# Altium PCB Rene_panel_pcb.PcbDoc
Units mm, origin at the board's own origin, x right, y up, seen from the top; angles counter-clockwise.
Board outline 172.2 x 128.5 mm, 2 copper layers (Top Layer, Bottom Layer); 74 components, 37 nets, 271 pads, 8 vias.
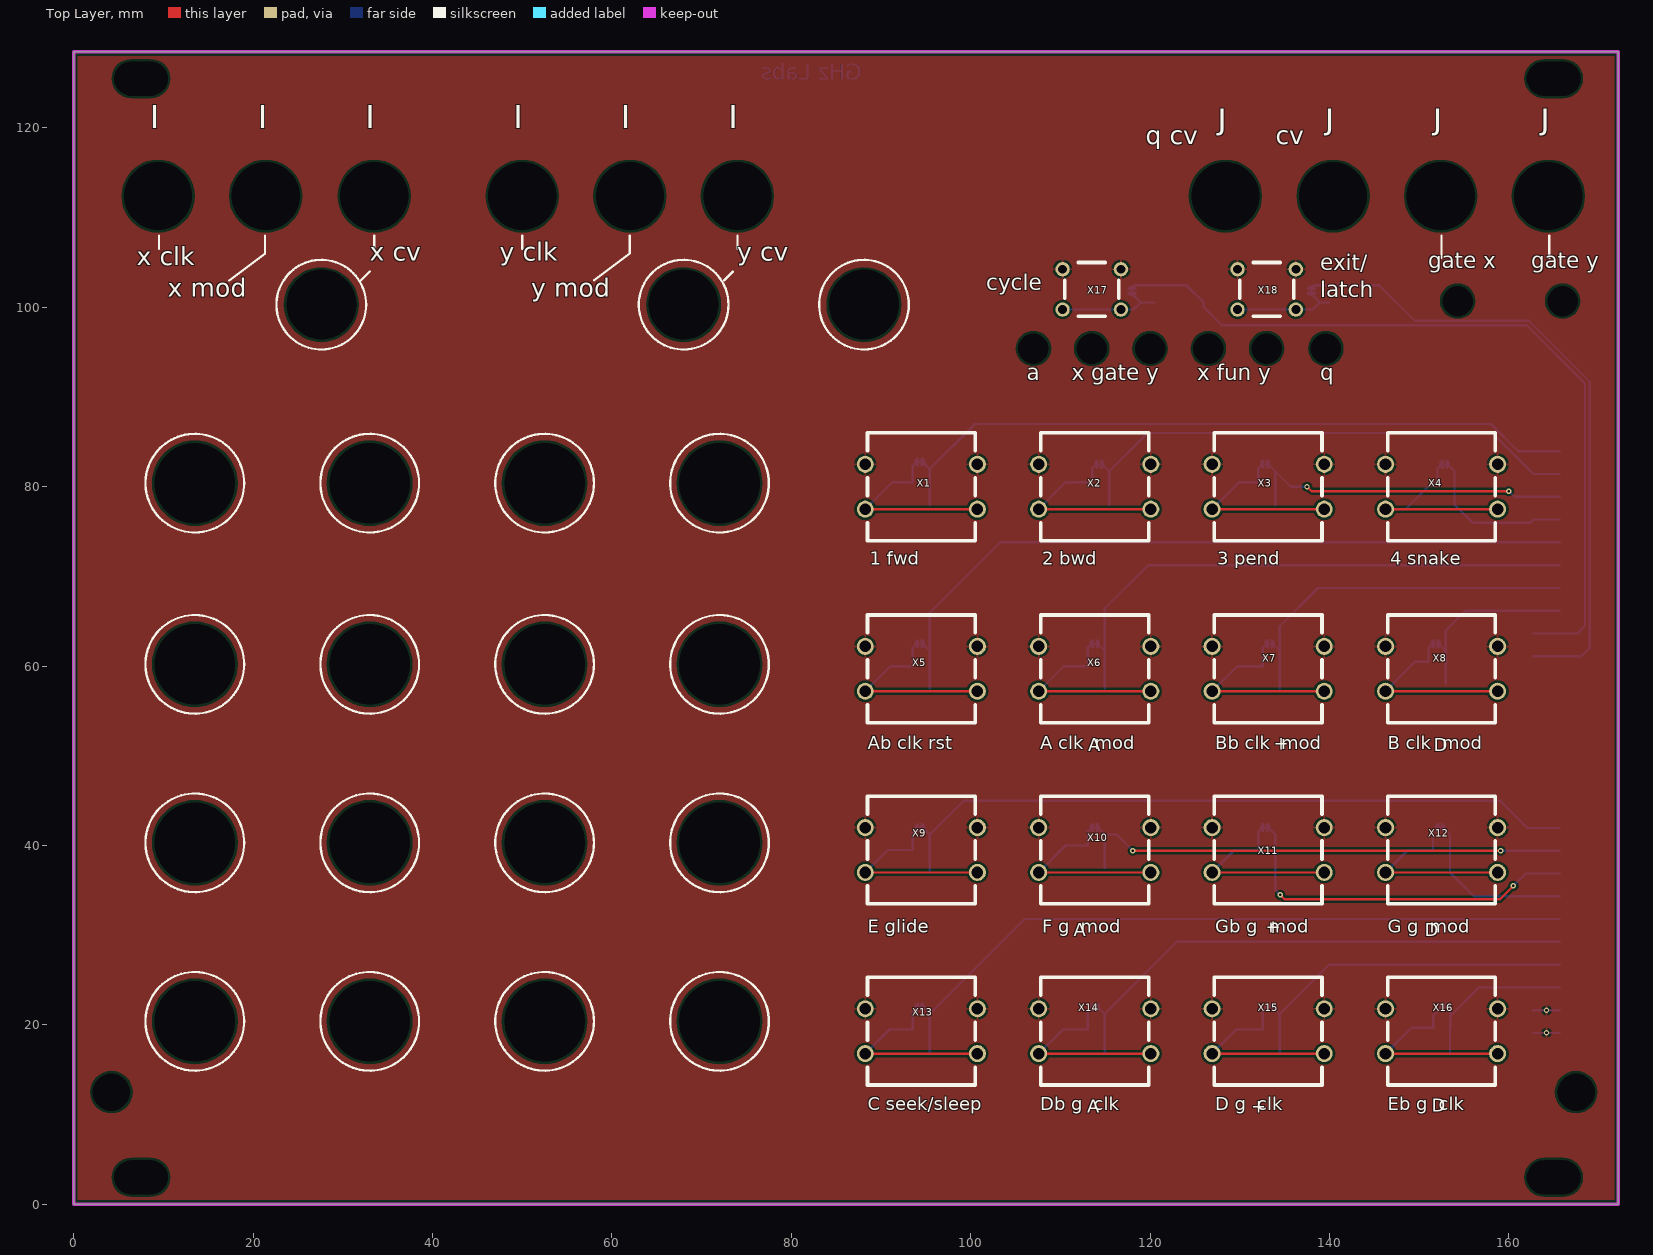
[diagram p0: Top Layer view]
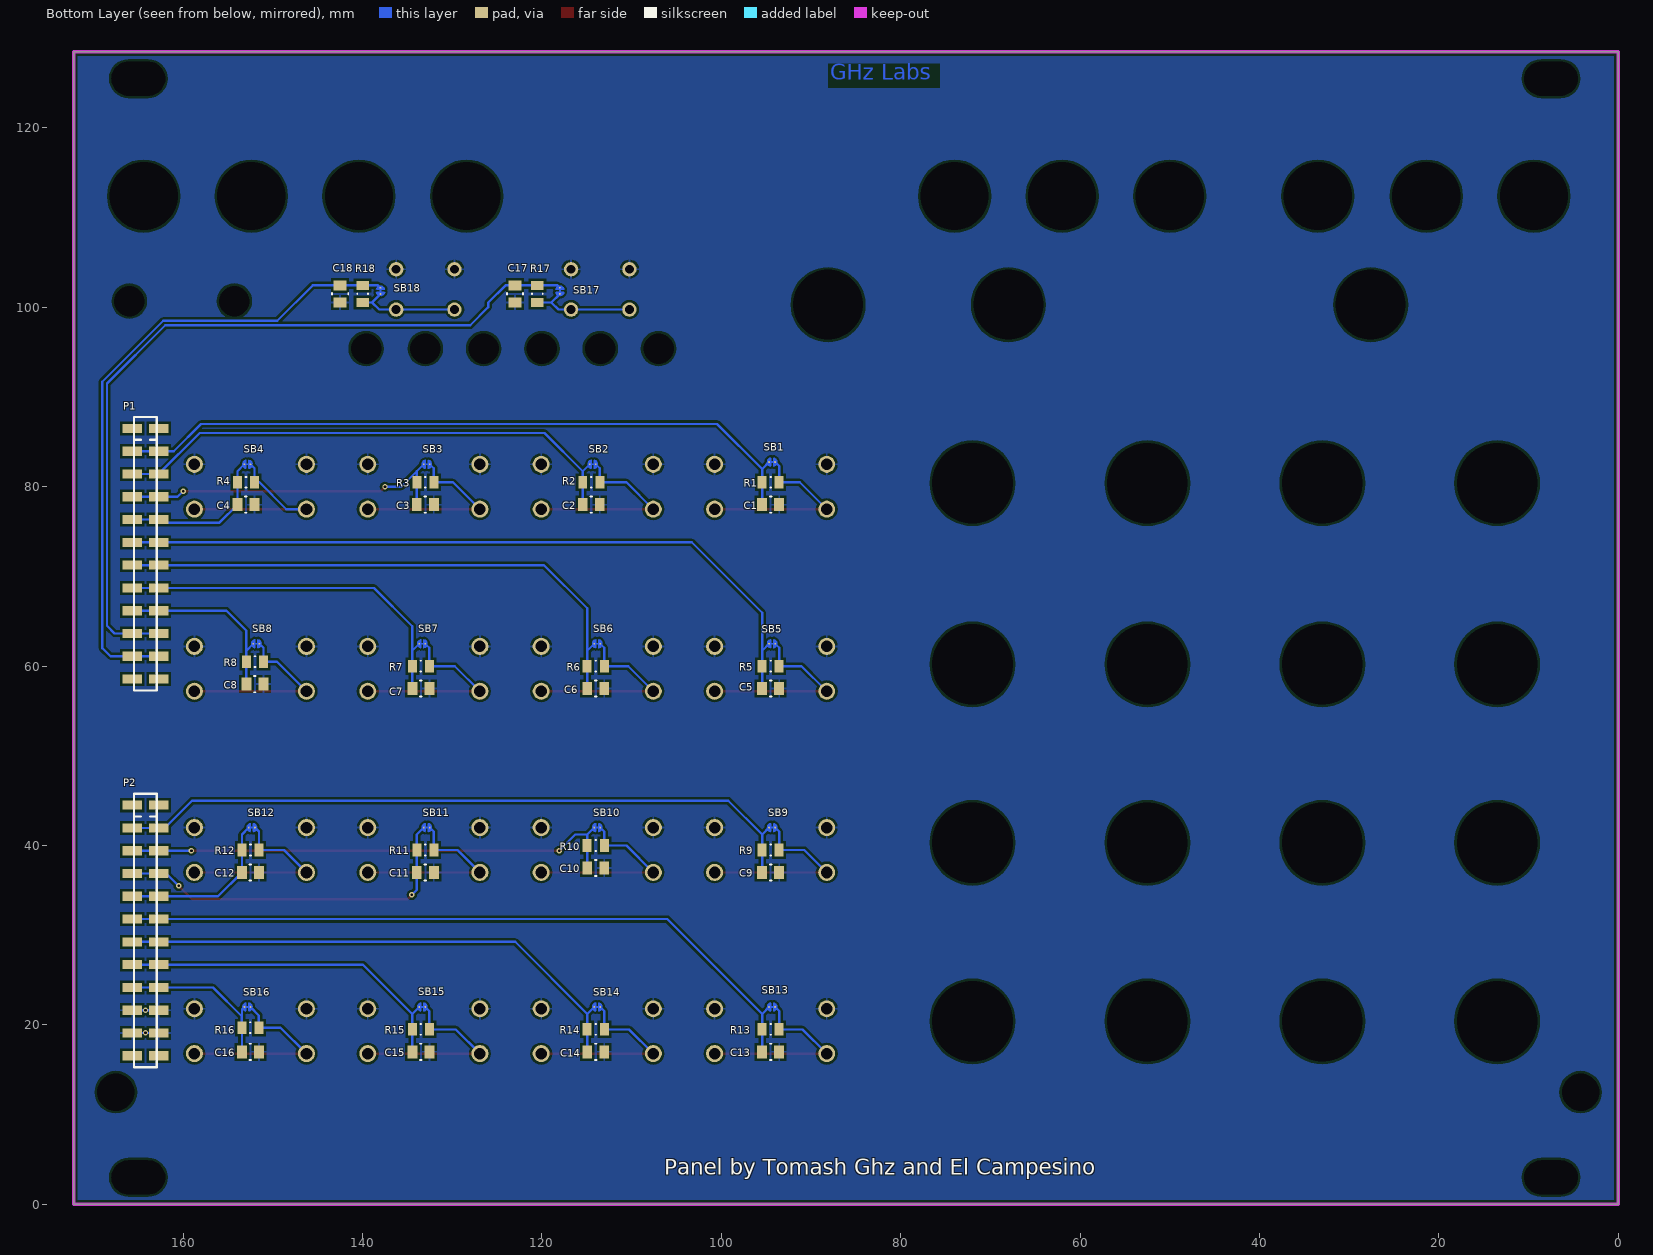
[diagram p1: Bottom Layer view, seen from below]
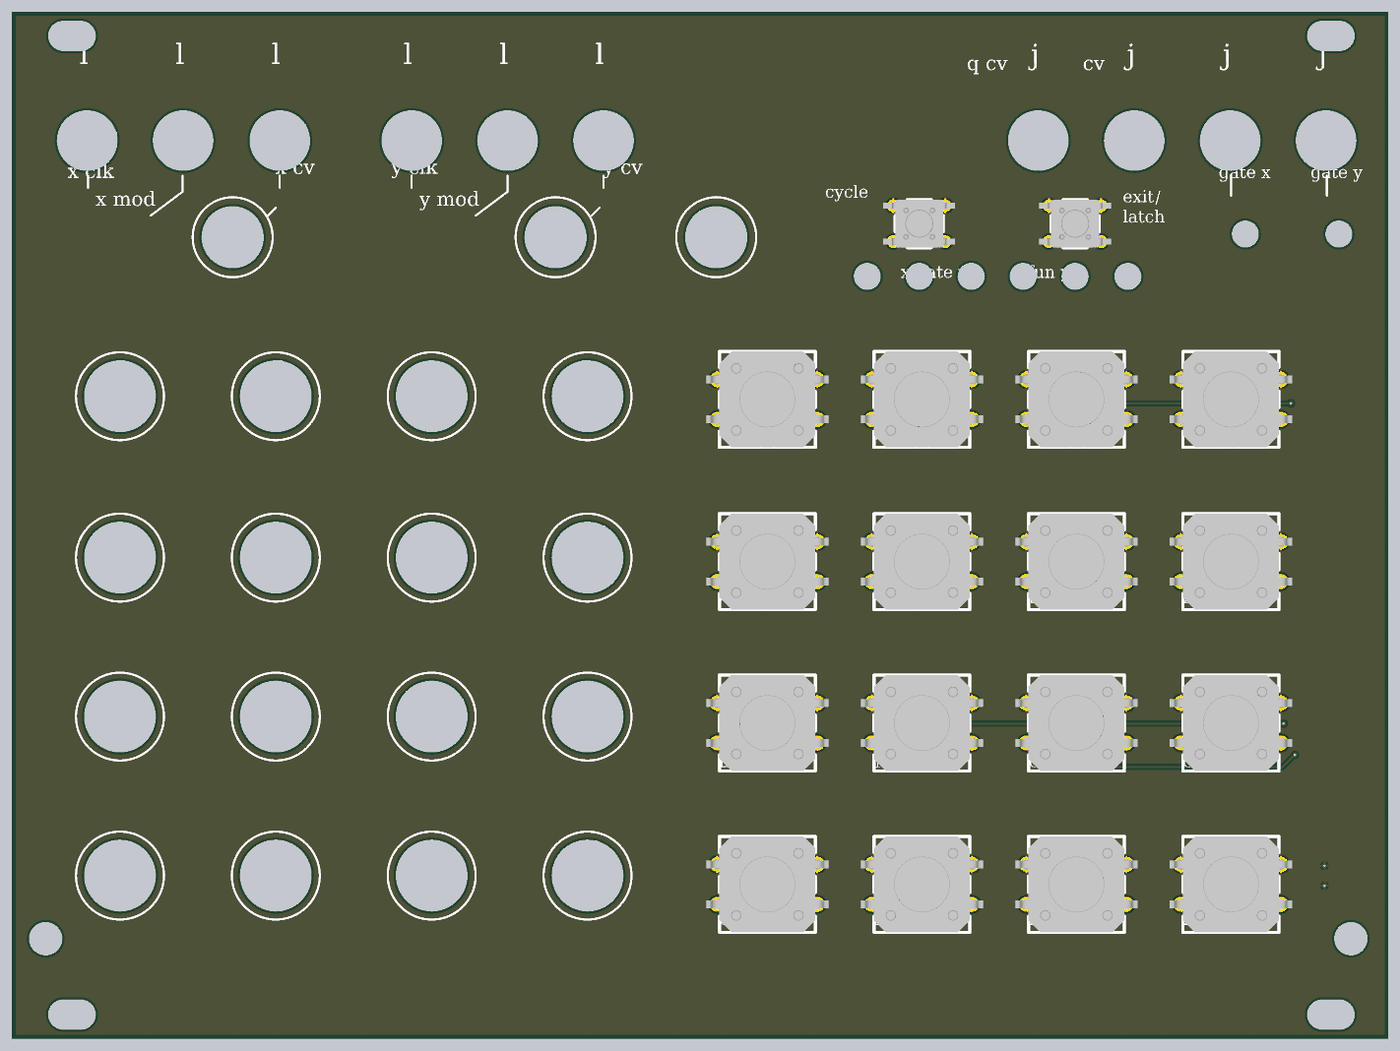
[diagram p2: 3D render of the assembled board from above, using the file's embedded part models]
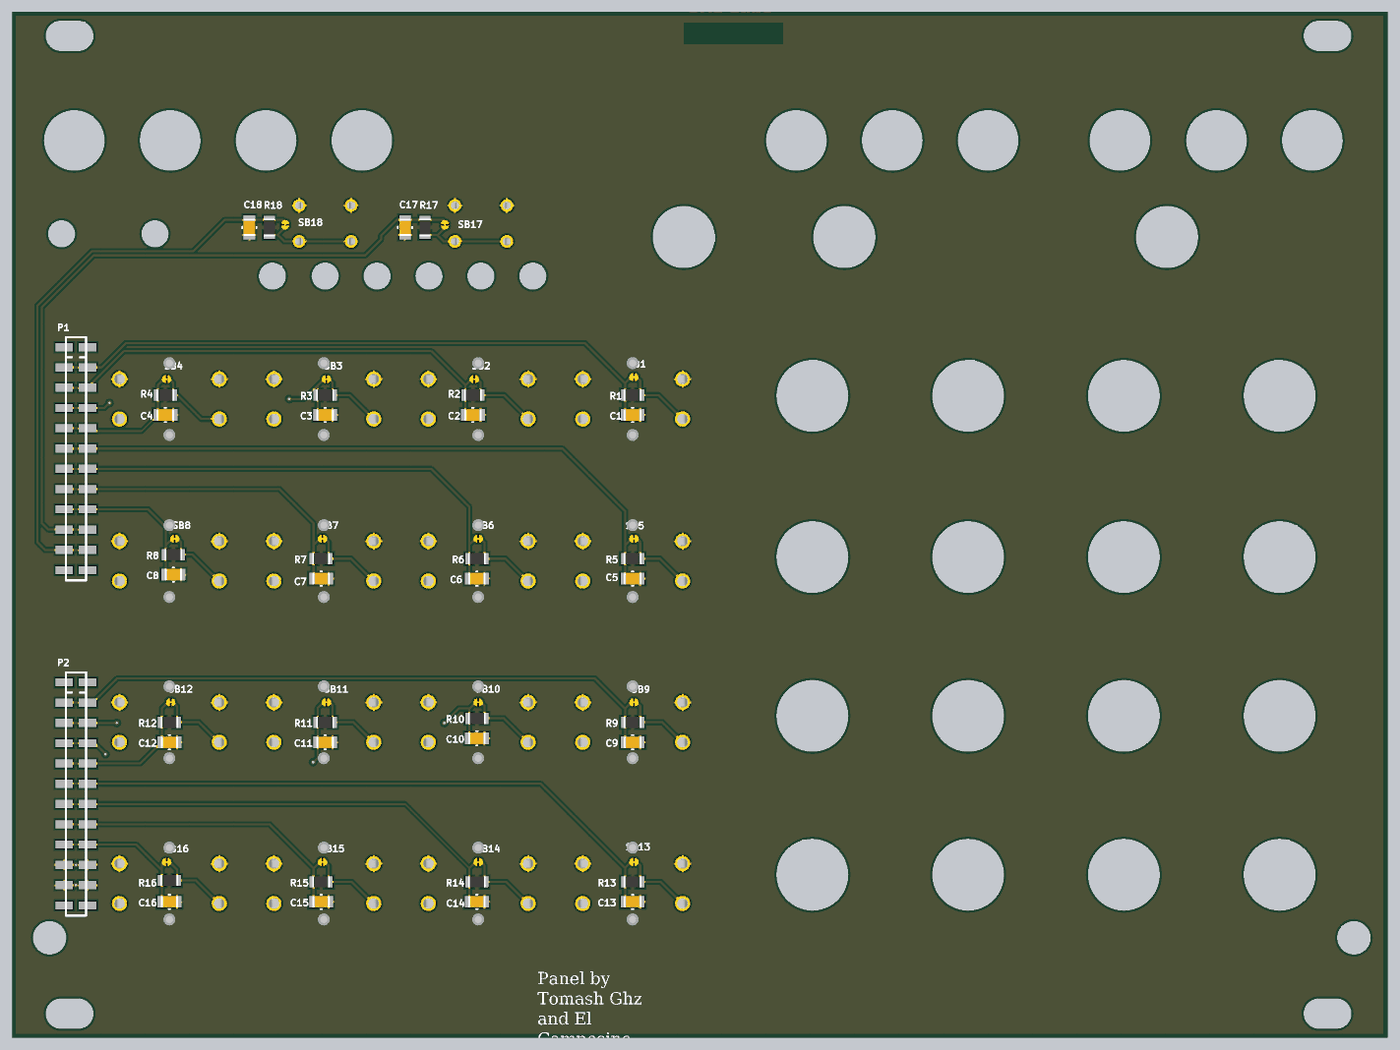
[diagram p3: 3D render of the assembled board from below, using the file's embedded part models]

## Layer stack, top to bottom
Top Solder: solder mask 0.0102, Solder Resist, Dk 3.5
Top Layer: signal copper 0.0356
Dielectric 1: dielectric 0.32, FR-4, Dk 4.8
Bottom Layer: signal copper 0.0356
Bottom Solder: solder mask 0.0102, Solder Resist, Dk 3.5

## Board outline
0,0 0,128.5 172.2,128.5 172.2,0

## Design rules (kind name [scope] priority, off if disabled: settings)
Clearance [All] p1: gap=0.254
PolygonConnect [All] p1: connectstyle=Relief reliefconductorwidth=0.254 reliefentries=4 polygonreliefangle="90 Angle" airgapwidth=0.254
RoutingVias [All] p1: holewidth=0.711 width=1.27 viastyle="Through Hole" minholewidth=0.711 minwidth=1.27 maxholewidth=0.711 maxwidth=1.27
SolderMaskExpansion [All] p1: expansion=0.102
Width [All] p1: maxlimit=0.254 minlimit=0.254 preferedwidth=0.254
30 further rules are at their usual default settings.

## Components (designator, comment, footprint, x,y, rotation, side; value= is the part's Value field where it differs from the comment)
C1 "100nF" CAPA_0805 94.5,78 r0 bottom
C2 "100nF" CAPA_0805 114.5,78 r0 bottom
C3 "100nF" CAPA_0805 133,78 r0 bottom
C4 "100nF" CAPA_0805 153,78 r0 bottom
C5 "100nF" CAPA_0805 94.5,57.5 r0 bottom
C6 "100nF" CAPA_0805 114,57.5 r0 bottom
C7 "100nF" CAPA_0805 133.5,57.5 r0 bottom
C8 "100nF" CAPA_0805 152,58 r0 bottom
C9 "100nF" CAPA_0805 94.5,37 r0 bottom
C10 "100nF" CAPA_0805 114,37.5 r0 bottom
C11 "100nF" CAPA_0805 133,37 r0 bottom
C12 "100nF" CAPA_0805 152.5,37 r0 bottom
C13 "100nF" CAPA_0805 94.5,17 r0 bottom
C14 "100nF" CAPA_0805 114,17 r0 bottom
C15 "100nF" CAPA_0805 133.5,17 r0 bottom
C16 "100nF" CAPA_0805 152.5,17 r0 bottom
C17 "100nF" CAPA_0805 123,101.5 r90 bottom
C18 "100nF" CAPA_0805 142.5,101.5 r90 bottom
P1 "Header 12" LIST_1x12_SMD 164.2,86.5 r270 bottom locked
P2 "Header 12" LIST_1x12_SMD 164.2,44.5 r270 bottom locked
R1 "1k" RES_0805 94.5,80.5 r180 bottom
R2 "1k" RES_0805 114.5,80.5 r180 bottom
R3 "1k" RES_0805 133,80.5 r180 bottom
R4 "1k" RES_0805 153,80.5 r180 bottom
R5 "1k" RES_0805 94.5,60 r180 bottom
R6 "1k" RES_0805 114,60 r180 bottom
R7 "1k" RES_0805 133.5,60 r180 bottom
R8 "1k" RES_0805 152,60.5 r180 bottom
R9 "1k" RES_0805 94.5,39.5 r180 bottom
R10 "1k" RES_0805 114,40 r180 bottom
R11 "1k" RES_0805 133,39.5 r180 bottom
R12 "1k" RES_0805 152.5,39.5 r180 bottom
R13 "1k" RES_0805 94.5,19.5 r180 bottom
R14 "1k" RES_0805 114,19.5 r180 bottom
R15 "1k" RES_0805 133.5,19.5 r180 bottom
R16 "1k" RES_0805 152.508,19.689 r180 bottom
R17 "1k" RES_0805 120.5,101.5 r270 bottom
R18 "1k" RES_0805 140,101.5 r270 bottom
SB1 "Solderbridge" Solderbridge_Shorted 94,82.75 r0 bottom net-tie
SB2 "Solderbridge" Solderbridge_Shorted 114,82.5 r0 bottom net-tie
SB3 "Solderbridge" Solderbridge_Shorted 132.5,82.5 r0 bottom net-tie
SB4 "Solderbridge" Solderbridge_Shorted 152.5,82.5 r0 bottom net-tie
SB5 "Solderbridge" Solderbridge_Shorted 94,62.5 r0 bottom net-tie
SB6 "Solderbridge" Solderbridge_Shorted 113.5,62.5 r0 bottom net-tie
SB7 "Solderbridge" Solderbridge_Shorted 133,62.5 r0 bottom net-tie
SB8 "Solderbridge" Solderbridge_Shorted 151.5,62.5 r0 bottom net-tie
SB9 "Solderbridge" Solderbridge_Shorted 94,42 r0 bottom net-tie
SB10 "Solderbridge" Solderbridge_Shorted 113.5,42 r0 bottom net-tie
SB11 "Solderbridge" Solderbridge_Shorted 132.5,42 r0 bottom net-tie
SB12 "Solderbridge" Solderbridge_Shorted 152,42 r0 bottom net-tie
SB13 "Solderbridge" Solderbridge_Shorted 94,22 r0 bottom net-tie
SB14 "Solderbridge" Solderbridge_Shorted 113.5,22 r0 bottom net-tie
SB15 "Solderbridge" Solderbridge_Shorted 133,22 r0 bottom net-tie
SB16 "Solderbridge" Solderbridge_Shorted 152.5,22 r0 bottom net-tie
SB17 "Solderbridge" Solderbridge_Shorted 118,101.5 r90 bottom net-tie
SB18 "Solderbridge" Solderbridge_Shorted 138,101.5 r90 bottom net-tie
X1 "101-0124-EV" Tactile_switch_12mm_TH 94.5,80 r180 top locked
X2 "101-0124-EV" Tactile_switch_12mm_TH 113.833,80 r180 top locked
X3 "101-0124-EV" Tactile_switch_12mm_TH 133.167,80 r180 top locked
X4 "101-0124-EV" Tactile_switch_12mm_TH 152.5,80 r180 top locked
X5 "101-0124-EV" Tactile_switch_12mm_TH 94.5,59.7 r180 top locked
X6 "101-0124-EV" Tactile_switch_12mm_TH 113.833,59.7 r180 top locked
X7 "101-0124-EV" Tactile_switch_12mm_TH 133.167,59.7 r180 top locked
X8 "101-0124-EV" Tactile_switch_12mm_TH 152.5,59.7 r180 top locked
X9 "101-0124-EV" Tactile_switch_12mm_TH 94.5,39.5 r180 top locked
X10 "101-0124-EV" Tactile_switch_12mm_TH 113.833,39.5 r180 top locked
X11 "101-0124-EV" Tactile_switch_12mm_TH 133.167,39.5 r180 top locked
X12 "101-0124-EV" Tactile_switch_12mm_TH 152.5,39.5 r180 top locked
X13 "101-0124-EV" Tactile_switch_12mm_TH 94.5,19.3 r180 top locked
X14 "101-0124-EV" Tactile_switch_12mm_TH 113.833,19.3 r180 top locked
X15 "101-0124-EV" Tactile_switch_12mm_TH 133.167,19.3 r180 top locked
X16 "101-0124-EV" Tactile_switch_12mm_TH 152.5,19.3 r180 top locked
X17 "PTS645SM43SMTR 92 LFS" Tactile_switch_6mm_TH 113.5,102 r180 top
X18 "PTS645SM43SMTR 92 LFS" Tactile_switch_6mm_TH 133,102 r180 top

## Footprints (in the part's own frame and the unit in brackets; to place one, negate y for a bottom-side part, rotate by r counter-clockwise, add the part's x,y. Pads: shape width x height; smd on the part's side, far side on the other; paste and mask are expansions set on the pad)
CAPA_0805 [mm]
  rect 1.1x1.45 smd: 1(-0.95,0) 2(0.95,0)
  silkscreen extent -0.1,-0.9 0.1,0.9, body extent -1.1,-0.72 1.1,0.72, height 0.5
LIST_1x12_SMD [mm] "Pin List, 2.54mm, SMD"
  rect 1.02x2.19 smd: 1(0,-1.465) 1(0,1.465) 2(2.54,-1.465) 2(2.54,1.465) 3(5.08,-1.465) 3(5.08,1.465) 4(7.62,-1.465) 4(7.62,1.465) 5(10.16,-1.465) 5(10.16,1.465) 6(12.7,-1.465) 6(12.7,1.465) 7(15.24,-1.465) 7(15.24,1.465) 8(17.78,-1.465) 8(17.78,1.465) 9(20.32,-1.465) 9(20.32,1.465) 10(22.86,-1.465) 10(22.86,1.465) 11(25.4,-1.465) 11(25.4,1.465) 12(27.94,-1.465) 12(27.94,1.465)
  silkscreen extent -1.27,-1.27 29.21,1.27
RES_0805 [mm] "0805 Chip Resistor, 2-Leads, Body 2.05x1.25mm, IPC Medium Density"
  rect 1x1.4 smd: 1(-0.95,0) 2(0.95,0)
  silkscreen extent -0.05,-0.6 0.05,0.6, body extent -1.1,-0.7 1.1,0.7, height 0.5
Solderbridge_Shorted [mm]
  round 0.2 smd paste-10: 1(0,0) 2(0.676,0)
  Top Layer region: 0.236,-0.432 0.16,-0.505 0.042,-0.467 -0.023,-0.424 -0.097,-0.351 -0.15,-0.292 -0.208,-0.193 -0.236,-0.099 -0.231,0.122 -0.206,0.193 -0.122,0.33 -0.038,0.411 0.054,0.469 0.155,0.5 0.206,0.483 0.236,0.43
  Top Layer region: 0.44,0.432 0.516,0.505 0.634,0.467 0.699,0.424 0.772,0.351 0.826,0.292 0.884,0.193 0.912,0.099 0.907,-0.122 0.881,-0.193 0.798,-0.33 0.714,-0.411 0.622,-0.469 0.521,-0.5 0.47,-0.483 0.44,-0.43
  Top Layer lines w0.152: 0.159,0.431 ccw(c0.27,0) 0.159,-0.431 ; 0.516,0.431 cw(c0.406,0) 0.516,-0.431
  Top Layer lines w0.203: 0,0 0.676,0
Tactile_switch_6mm_TH [mm] "TH 6mmx6mm Tactile Switch"
  round 1.6 hole 1: 1(-3.25,2.25) 1(3.25,2.25) 2(-3.25,-2.25) 2(3.25,-2.25)
  silkscreen extent -3,-3 3,3, body extent -4.5,-3 4.5,3, height 4.3
Tactile_switch_12mm_TH [mm] "TH 12mmx12mm Tactile Switch"
  round 1.9 hole 1.3: 1(-6.25,2.5) 1(6.25,2.5) 2(-6.25,-2.5) 2(6.25,-2.5)
  silkscreen extent -6,-6 6,6, body extent -7.65,-6 7.65,6, height 4.3

## Part data
C1 C2 C3 C4 C5 C6 C7 C8 C9 C10 C11 C12 C13 C14 C15 C16 C17 C18: library part Capacitor, "100nF 0805"
P1 P2: "Header, 12-Pin"
R1 R2 R3 R4 R5 R6 R7 R8 R9 R10 R11 R12 R13 R14 R15 R16 R17 R18: library part Resistor, "10k 0805"
SB1 SB2 SB3 SB4 SB5 SB6 SB7 SB8 SB9 SB10 SB11 SB12 SB13 SB14 SB15 SB16 SB17 SB18: library part SOLDERBRIDGE_SHORTED, "Shorted Solderbridge"
X1 X2 X3 X4 X5 X6 X7 X8 X9 X10 X11 X12 X13 X14 X15 X16 X17 X18: library part "SWITCH/Push Button-EVPAWBA2A", "Push Button SMD EVPAWBA2A"

## Free pads (board coordinates)
  round 0 hole 3.8 slot 6 at 0 deg unplated: 1(7.5,3) 1(7.5,125.5) 1(165,3) 1(165,125.5)
  round 0 hole 9 unplated: 2(13.5,20.4) 2(13.5,40.3) 2(13.5,60.2) 2(13.5,80.4) 2(33,80.4) 2(33,20.4) 2(33,40.3) 2(33,60.2) 2(52.5,80.4) 2(52.5,20.4) 2(52.5,40.3) 2(52.5,60.2) 2(72,80.4) 2(72,20.4) 2(72,40.3) 2(72,60.2)
  round 0 hole 7.6 unplated: 3(9.4,112.4) 3(21.4,112.4) 3(33.5,112.4) 3(50,112.4) 3(62,112.4) 3(74,112.4) 3(128.4,112.4) 3(140.4,112.4) 3(152.4,112.4) 3(164.4,112.4)
  round 0 hole 7.8 unplated: 4(27.6,100.3) 4(68,100.3) 4(88.1,100.3)
  round 0 hole 3.4 unplated: 5(154.3,100.7) 5(166,100.7) 6(107,95.4) 6(113.5,95.4) 6(120,95.4) 6(126.5,95.4) 6(133,95.4) 6(139.6,95.4)
  round 0 hole 4.2 unplated: 7(4.2,12.5)
  round 0 hole 4.2 unplated paste+0: 7(167.5,12.5)

## Via types
v1: diameter 0.6, hole 0.3, Top Layer to Bottom Layer, tented both sides, 8 vias

## Nets (pads, with @x,y where several pads share a name; then routed paths per layer and width w, separated by ;. In a path a pad name is that pad's centre, name@x,y a point inside that pad or via, vN(x,y) a via of type N, cw(c..) or ccw(c..) an arc to the next point about the centre after c; other vN are vias at no path point)
GND: C1.1 C2.1 C3.1 C4.1 C5.1 C6.1 C7.1 C8.1 C9.1 C10.1 C11.1 C12.1 C13.1 C14.1 C15.1 C16.1 C17.1 C18.1 P2.10 P2.11 X1.2 X2.2 X3.2 X4.2 X5.2 X6.2 X7.2 X8.2 X9.2 X10.2 X11.2 X12.2 X13.2 X14.2 X15.2 X16.2 X17.2 X18.2 | length 5.9
  Bottom Layer w0.254: P2.11@162.735,19.1 P2.11@165.665,19.1 ; P2.10@162.735,21.64 P2.10@165.665,21.64
  other v1: 164.2,19.125 164.2,21.625
NetR1_2: R1.2 SB1.1 X1.1 | length 21.5
  Top Layer w0.254: X1.1@88.25,77.5 X1.1@100.75,77.5
  Bottom Layer w0.254: X1.1@88.25,77.5 91.25,80.5 R1.2 93.55,82.3 SB1.1
NetR2_2: R2.2 SB2.1 X2.1 | length 21.9
  Top Layer w0.254: X2.1@107.583,77.5 X2.1@120.083,77.5
  Bottom Layer w0.254: X2.1@107.583,77.5 110.583,80.5 R2.2 113.55,82.05 SB2.1
NetR3_2: R3.2 SB3.1 X3.1 | length 21.1
  Top Layer w0.254: X3.1@126.917,77.5 X3.1@139.417,77.5
  Bottom Layer w0.254: X3.1@126.917,77.5 129.917,80.5 R3.2 132.05,82.05 SB3.1
NetR4_2: R4.2 SB4.1 X4.1 | length 21.7
  Top Layer w0.254: X4.1@146.25,77.5 X4.1@158.75,77.5
  Bottom Layer w0.254: X4.1@146.25,77.5 148.5,77.5 151.5,80.5 R4.2 152.05,82.05 SB4.1
NetR5_2: R5.2 SB5.1 X5.1 | length 21.6
  Top Layer w0.254: X5.1@88.25,57.2 X5.1@100.75,57.2
  Bottom Layer w0.254: X5.1@88.25,57.2 91.05,60 R5.2 93.55,62.05 SB5.1
NetR6_2: R6.2 SB6.1 X6.1 | length 21.8
  Top Layer w0.254: X6.1@107.583,57.2 X6.1@120.083,57.2
  Bottom Layer w0.254: X6.1@107.583,57.2 110.383,60 R6.2 113.05,62.05 SB6.1
NetR7_2: R7.2 SB7.1 X7.1 | length 22
  Top Layer w0.254: X7.1@126.917,57.2 X7.1@139.417,57.2
  Bottom Layer w0.254: X7.1@126.917,57.2 129.717,60 R7.2 132.55,62.05 SB7.1
NetR8_2: R8.2 SB8.1 X8.1 | length 20.9
  Top Layer w0.254: X8.1@146.25,57.2 X8.1@158.75,57.2
  Bottom Layer w0.254: X8.1@146.25,57.2 149.55,60.5 R8.2 151.05,62.05 SB8.1
NetR9_2: R9.2 SB9.1 X9.1 | length 21.5
  Top Layer w0.254: X9.1@88.25,37 X9.1@100.75,37
  Bottom Layer w0.254: X9.1@88.25,37 90.75,39.5 R9.2 93.55,41.55 SB9.1
NetR10_2: R10.2 SB10.1 X10.1 | length 21.4
  Top Layer w0.254: X10.1@107.583,37 X10.1@120.083,37
  Bottom Layer w0.254: X10.1@107.583,37 110.583,40 R10.2 113.05,41.55 SB10.1
NetR11_2: R11.2 SB11.1 X11.1 | length 21.4
  Top Layer w0.254: X11.1@126.917,37 X11.1@139.417,37
  Bottom Layer w0.254: X11.1@126.917,37 129.417,39.5 R11.2 132.05,41.55 SB11.1
NetR12_2: R12.2 SB12.1 X12.1 | length 21.5
  Top Layer w0.254: X12.1@146.25,37 X12.1@158.75,37
  Bottom Layer w0.254: X12.1@146.25,37 148.75,39.5 R12.2 151.55,41.55 SB12.1
NetR13_2: R13.2 SB13.1 X13.1 | length 21.6
  Top Layer w0.254: X13.1@88.25,16.8 X13.1@100.75,16.8
  Bottom Layer w0.254: X13.1@88.25,16.8 90.95,19.5 R13.2 93.55,21.55 SB13.1
NetR14_2: R14.2 SB14.1 X14.1 | length 21.8
  Top Layer w0.254: X14.1@107.583,16.8 X14.1@120.083,16.8
  Bottom Layer w0.254: X14.1@107.583,16.8 110.283,19.5 R14.2 113.05,21.55 SB14.1
NetR15_2: R15.2 SB15.1 X15.1 | length 21.9
  Top Layer w0.254: X15.1@126.917,16.8 X15.1@139.417,16.8
  Bottom Layer w0.254: X15.1@126.917,16.8 129.617,19.5 R15.2 132.55,21.55 SB15.1
NetR16_2: R16.2 SB16.1 X16.1 | length 21.7
  Top Layer w0.254: X16.1@146.25,16.8 X16.1@158.75,16.8
  Bottom Layer w0.254: X16.1@146.25,16.8 149.139,19.689 R16.2 151.558,21.058 SB16.1
NetR17_2: R17.2 SB17.1 X17.1 | length 11.9
  Bottom Layer w0.254: X17.1@110.25,99.75 116.75,99.75 118.15,99.75 118.95,100.55 ; SB17.1 118.95,100.55 ; R17.2 118.95,100.55
NetR18_2: R18.2 SB18.1 X18.1 | length 11.9
  Bottom Layer w0.254: X18.1@129.75,99.75 136.25,99.75 138.15,99.75 138.95,100.55 ; SB18.1 138.95,100.55 ; R18.2 138.95,100.55
P1: C1.2 P1.2 R1.1 SB1.2 | length 78.6
  Bottom Layer w0.254: SB1.2 95.45,81.976 ; C1.2 R1.1 95.45,81.976 ; P1.2@165.665,83.96 162.735,83.96 161.04,83.96 158,87 100.474,87 95.45,81.976
P2: C2.2 P1.3 R2.1 SB2.2 | length 58.7
  Bottom Layer w0.254: SB2.2 115.45,81.726 ; C2.2 R2.1 115.45,81.726 ; P1.3@165.665,81.42 162.735,81.42 158.155,86 119.724,86 115.45,81.726
P3: C3.2 P1.4 R3.1 SB3.2 | length 37.7
  Top Layer w0.254: v1(137.5,80) 138,79.5 v1(160,79.5)
  Bottom Layer w0.254: SB3.2 133.95,81.726 ; C3.2 R3.1 133.95,81.726 ; v1(137.5,80) 135.676,80 133.95,81.726 ; v1(160,79.5) 160.62,78.88 162.735,78.88 P1.4@165.665,78.88
P4: C4.2 P1.5 R4.1 SB4.2 | length 17.5
  Bottom Layer w0.254: SB4.2 153.95,81.726 R4.1 C4.2 155.95,76 162.395,76 162.735,76.34 P1.5@165.665,76.34
P5: C5.2 P1.6 R5.1 SB5.2 | length 83
  Bottom Layer w0.254: SB5.2 95.45,61.726 ; C5.2 R5.1 95.45,61.726 ; P1.6@165.665,73.8 162.735,73.8 103.3,73.8 95.45,65.95 95.45,61.726
P6: C6.2 P1.7 R6.1 SB6.2 | length 62.8
  Bottom Layer w0.254: SB6.2 114.95,61.726 ; C6.2 R6.1 114.95,61.726 ; P1.7@165.665,71.26 162.735,71.26 119.76,71.26 114.95,66.45 114.95,61.726
P7: C7.2 P1.8 R7.1 SB7.2 | length 41
  Bottom Layer w0.254: SB7.2 134.45,61.726 ; C7.2 R7.1 134.45,61.726 ; P1.8@165.665,68.72 162.735,68.72 138.72,68.72 134.45,64.45 134.45,61.726
P8: C8.2 P1.9 R8.1 SB8.2 | length 20.7
  Bottom Layer w0.254: SB8.2 152.95,61.726 ; C8.2 R8.1 152.95,61.726 ; P1.9@165.665,66.18 162.735,66.18 155.18,66.18 152.95,63.95 152.95,61.726
P9: C9.2 P2.2 R9.1 SB9.2 | length 78.4
  Bottom Layer w0.254: SB9.2 95.45,41.226 ; C9.2 R9.1 95.45,41.226 ; P2.2@165.665,41.96 162.735,41.96 162.04,41.96 159,45 99.224,45 95.45,41.226
P10: C10.2 P2.3 R10.1 SB10.2 | length 56.3
  Top Layer w0.254: v1(118.08,39.42) v1(159.08,39.42)
  Bottom Layer w0.254: SB10.2 114.95,41.226 ; C10.2 114.95,41.226 ; v1(118.08,39.42) 116.274,41.226 114.95,41.226 ; v1(159.08,39.42) 162.735,39.42 P2.3@165.665,39.42
P11: C11.2 P2.4 R11.1 SB11.2 | length 40.6
  Top Layer w0.254: v1(134.5,34.5) 135,34 159,34 v1(160.5,35.5)
  Bottom Layer w0.254: SB11.2 133.95,41.226 C11.2 133.95,35.05 v1(134.5,34.5) ; v1(160.5,35.5) 161.88,36.88 162.735,36.88 P2.4@165.665,36.88
P12: C12.2 P2.5 R12.1 SB12.2 | length 18.6
  Bottom Layer w0.254: SB12.2 153.45,41.226 C12.2 156.11,34.34 162.735,34.34 P2.5@165.665,34.34
P13: C13.2 P2.6 R13.1 SB13.2 | length 79.9
  Bottom Layer w0.254: SB13.2 95.45,21.226 ; C13.2 95.45,21.226 ; P2.6@165.665,31.8 162.735,31.8 106.024,31.8 95.45,21.226
P14: C14.2 P2.7 R14.1 SB14.2 | length 59.4
  Bottom Layer w0.254: SB14.2 114.95,21.226 ; C14.2 114.95,21.226 ; P2.7@165.665,29.26 162.735,29.26 122.984,29.26 114.95,21.226
P15: C15.2 P2.8 R15.1 SB15.2 | length 38.8
  Bottom Layer w0.254: SB15.2 134.45,21.226 ; C15.2 134.45,21.226 ; P2.8@165.665,26.72 162.735,26.72 139.944,26.72 134.45,21.226
P16: C16.2 P2.9 R16.1 SB16.2 | length 19.9
  Bottom Layer w0.254: SB16.2 153.45,21.726 C16.2 ; R16.1 153.458,20.958 156.68,24.18 162.735,24.18 P2.9@165.665,24.18
P17: C17.2 P1.10 R17.1 SB17.2 | length 88.6
  Bottom Layer w0.254: SB17.2 118.274,102.45 C17.2 124.05,102.45 126,100.5 126,100 128,98 162,98 168.5,91.5 168.5,64.5 167.64,63.64 165.665,63.64 P1.10@162.735,63.64
P18: C18.2 P1.11 R18.1 SB18.2 | length 71.9
  Bottom Layer w0.254: SB18.2 138.274,102.45 R18.1 C18.2 145.558,102.45 149.5,98.508 162.21,98.508 169.008,91.71 169.008,62.008 168.1,61.1 165.665,61.1 P1.11@162.735,61.1
pads on no net: P1.1 P1.12 P2.1 P2.12

## Polygon pours and split planes (outlines as drawn)
GND on Top Layer "GND" (solid, pour order 2): 0.263,128 0.263,0.5 171.763,0.5 171.763,128 150.263,128
GND on Bottom Layer "GND" (solid, pour order 0): 0.5,128 0.5,0.5 172,0.5 172,128 150.5,128

## Keep-outs
Keep-Out Layer:
  the board outline again, w0.4

## Other copper
Bottom Layer:
  text "GHz Labs" at 87.85,124.75 h3

## Silkscreen, mask and mechanical layers (free items; w line width, h text height)
Top Overlay:
  circle w0.254: c72,20.4 r5.5
  circle w0.254: c52.5,20.4 r5.5
  circle w0.254: c33,20.4 r5.5
  circle w0.254: c13.5,20.4 r5.5
  circle w0.254: c13.5,40.3 r5.5
  circle w0.254: c33,40.3 r5.5
  circle w0.254: c52.5,40.3 r5.5
  circle w0.254: c72,40.3 r5.5
  circle w0.254: c72,60.2 r5.5
  circle w0.254: c52.5,60.2 r5.5
  circle w0.254: c33,60.2 r5.5
  circle w0.254: c13.5,60.2 r5.5
  circle w0.254: c13.5,80.4 r5.5
  circle w0.254: c33,80.4 r5.5
  circle w0.254: c52.5,80.4 r5.5
  circle w0.254: c72,80.4 r5.5
  circle w0.254: c27.6,100.3 r5
  circle w0.254: c68,100.3 r5
  circle w0.254: c88.1,100.3 r5
  lines w0.254: 9.5,106.5 9.5,108 ; 17.333,103 21.333,106 21.333,108 ; 32,103 33,104 ; 33.5,106.5 33.5,108 ; 50,106.5 50,108 ; 58,103 62,106 62,108 ; 72.5,103 73.5,104 ; 74,106.5 74,108 ; 152.5,105.5 152.5,108 ; 164.5,105.5 164.5,108
  text "l" at 8.5,119.005 h5
  text "l" at 20.5,119.005 h5
  text "l" at 32.5,119.005 h5
  text "l" at 49,119.005 h5
  text "l" at 61,119.005 h5
  text "l" at 73,119.005 h5
  text "j" at 127.5,119 h5
  text "j" at 139.5,119 h5
  text "j" at 151.5,119 h5
  text "j" at 163.5,119 h5
  text "q cv" at 119.5,117.5 h3.5
  text "cv" at 134,117.5 h3.5
  text "x cv" at 33,104.5 h3.5
  text "y clk" at 47.5,104.5 h3.5
  text "y cv" at 74,104.5 h3.5
  text "x clk" at 7,104 h3.5
  text "gate x" at 151,103.75 h3
  text "gate y" at 162.5,103.75 h3
  text "cycle" at 101.75,101.29 h3
  text "x mod" at 10.5,100.5 h3.5
  text "y mod" at 51,100.5 h3.5
  text "exit/ / latch" at 139,100.5 h3
  text "a" at 106.25,91.25 h3
  text "x gate y" at 111.25,91.25 h3
  text "x fun y" at 125.25,91.25 h3
  text "q" at 139,91.25 h3
  text "4 snake" at 146.75,70.819 h2.5
  text "1 fwd" at 88.75,70.79 h2.5
  text "2 bwd" at 108,70.79 h2.5
  text "3 pend" at 127.5,70.79 h2.5
  text "Ab clk rst" at 88.5,50.25 h2.5
  text "A clk  mod" at 107.75,50.25 h2.5
  text "Bb clk  mod" at 127.25,50.25 h2.5
  text "B clk  mod" at 146.5,50.25 h2.5
  text "+" at 133.8,50.2 h2.5
  text "A" at 113.1,50 h2.5
  text "D" at 151.6,50 h2.5
  text "E glide" at 88.5,29.75 h2.5
  text "F g  mod" at 108,29.75 h2.5
  text "Gb g  mod" at 127.25,29.75 h2.5
  text "G g  mod" at 146.5,29.75 h2.5
  text "+" at 132.9,29.7 h2.5
  text "A" at 111.5,29.4 h2.5
  text "D" at 150.6,29.4 h2.5
  text "C seek/sleep" at 88.5,10.005 h2.5
  text "D g  clk" at 127.25,10.005 h2.5
  text "Db g  clk" at 107.75,10 h2.5
  text "Eb g  clk" at 146.5,10 h2.5
  text "D" at 151.4,9.8 h2.5
  text "A" at 113,9.7 h2.5
  text "+" at 131.3,9.7 h2.5
Bottom Overlay:
  text "Panel by Tomash Ghz and El Campesino" at 106.375,2.7 h3